# EAGLE board sensors (EAGLE 9.1.1)
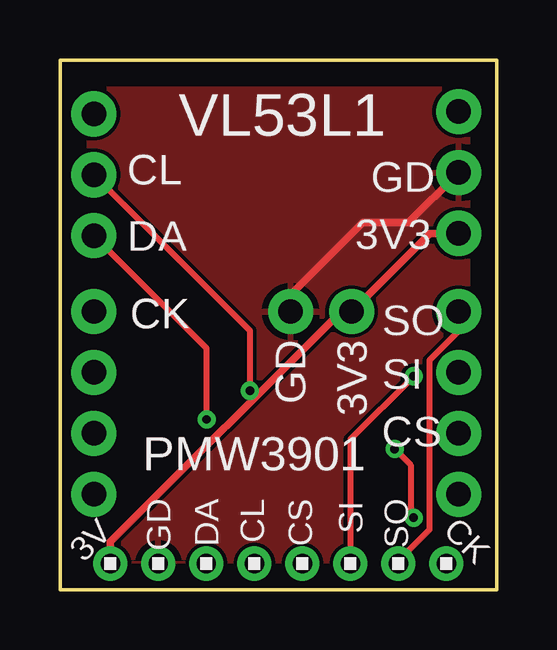
[diagram p0: board, top side]
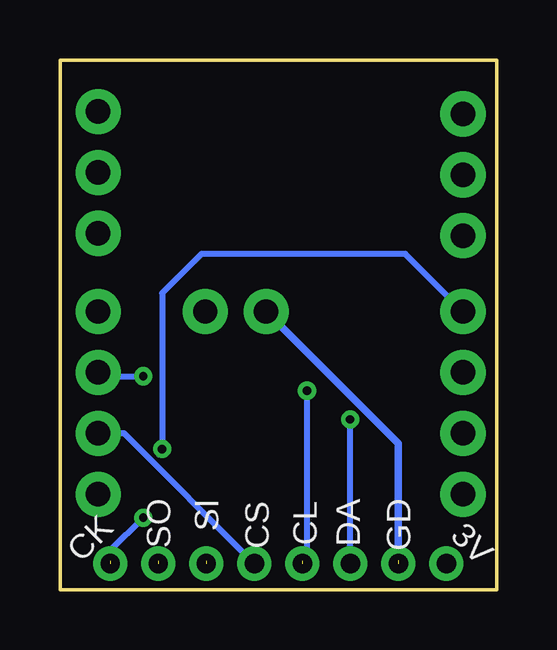
[diagram p1: board, bottom side, seen from below]

Size 18.2 x 22.1 mm. Coordinates in mm from the lower left corner, seen from the top.
Outline: 0,22.1 18.2,22.1 18.2,0 0,0 0,22.1
Copper layers (1*16): Top 0.035mm / dielectric 1.5mm / Bottom 0.035mm
Design rules "default": minimum track width 6mil, minimum drill 0.35mm, track to track 6mil, track to pad 6mil, pad to pad 6mil, via to via 6mil, smd to smd 6mil, copper to edge 40mil, drill to drill 6mil, minimum pad ring 10mil, minimum via ring 8mil, stop-mask expansion 4mil, vias tented up to drill 0mil, thermal gap 10mil

## Footprints (pad centres in the part's own frame; a part is rotated, then mirrored left to right if it is on the bottom)
1X02_NO_SILK = drill 1.016 pad 1.88: 1 0,0; 2 2.54,0
1X04_NO_SILK = drill 1.016 pad 1.88: 1 0,0; 2 2.54,0; 3 5.08,0; 4 7.62,0
1X8 = drill 0.8 pad 1.422: 1 -7,0; 2 -5,0; 3 -3,0; 4 -1,0; 5 1,0; 6 3,0; 7 5,0; 8 7,0
1X03_NO_SILK = drill 1.016 pad 1.88: 1 0,0; 2 2.54,0; 3 5.08,0

## Placement (x,y rotation side)
PMW3091  [1X02_NO_SILK]  9.61,11.61 0 top
PMW3901A  [1X04_NO_SILK]  16.61,11.61 270 top
PMW3901B  [1X04_NO_SILK]  1.41,11.61 270 top
U$1  1X8  [1X8]  9.1,1.1 180 top
VL53L1A  [1X03_NO_SILK]  16.61,19.95 270 top
VL53L1B  [1X03_NO_SILK]  1.41,19.85 270 top

## Library data of the parts
PMW3091 VL53L1A VL53L1B = SparkFun-Connectors
PMW3901A PMW3901B = SparkFun-Connectors; PROD_ID: CONN-09696
U$1 = headers(2mm)

## Nets
3V3: PMW3091.2 U$1.8 VL53L1A.3
CS: PMW3901A.3 U$1.4
EN: PMW3901B.2
GND: PMW3091.1 U$1.7 VL53L1A.2
LED: PMW3901A.4
MISO: PMW3901A.1 U$1.2
MOSI: PMW3901A.2 U$1.3
MOT: PMW3901B.3
RST: PMW3901B.4
SCK: PMW3901B.1 U$1.1
SCL: U$1.5 VL53L1B.2
SDA: U$1.6 VL53L1B.3

## Tracks (layer width: path | path; a pad name or v marks a point on that pad's centre or on a via)
3V3
  Top 0.305: U$1.8 2.1,2 11.71,11.61 PMW3091.2 15.41,14.87 VL53L1A.3
CS
  Bottom 0.254: U$1.4 15.53,6.53 PMW3901A.3
GND  (1 unrouted)
  Top 0.305: VL53L1A.2 14.51,15.31 12.61,15.31 9.61,12.31 PMW3091.1
  Bottom 0.305: PMW3091.1 4.1,6.1 4.1,1.24
  pour Top: -0.48,23.35 19.15,23.35 19.15,-1.62 -0.48,-1.62
MISO  (1 unrouted)
  Top 0.254: PMW3901A.1 16.61,10.8 15.39,9.58 15.39,2.51 14.1,1.22
MOSI  (via drill 0.35)  (1 unrouted)
  Top 0.254: v14.73,8.91 12.1,6.28 12.1,1.22
  Bottom 0.254: PMW3901A.2 16.45,8.91 v14.73,8.91 14.81,8.99 14.81,9.01
SCK  (via drill 0.35)  (1 unrouted)
  Top 0.254: v13.95,5.88 14.61,5.21 14.61,3.13 v14.73,3.01
  Bottom 0.254: PMW3901B.1 3.81,14.01 12.31,14.01 13.95,12.38 v13.95,5.88 14.12,5.7 14.07,5.65 13.96,5.76 | v14.73,3.01 16.1,1.64 16.1,1.22
SCL  (via drill 0.35)  (1 unrouted)
  Top 0.254: VL53L1B.2 7.91,10.81 v7.91,8.31
  Bottom 0.254: v7.91,8.31 7.91,1.41 8.1,1.22
SDA  (via drill 0.35)
  Top 0.254: v6.11,7.11 6.11,10.07 VL53L1B.3
  Bottom 0.254: U$1.6 v6.1,7.1 v6.11,7.11

## Text on the board
tNames: VL53L1 | CL | GD | DA | 3V3 | CK | GD | 3V3 | SO | SI | CS | PMW3901 | GD | DA | CL | CS | SI | SO | CK | 3V
bNames: GD | DA | CL | CS | SI | SO | 3V | CK